# EAGLE board M226X (EAGLE 6.6.0)
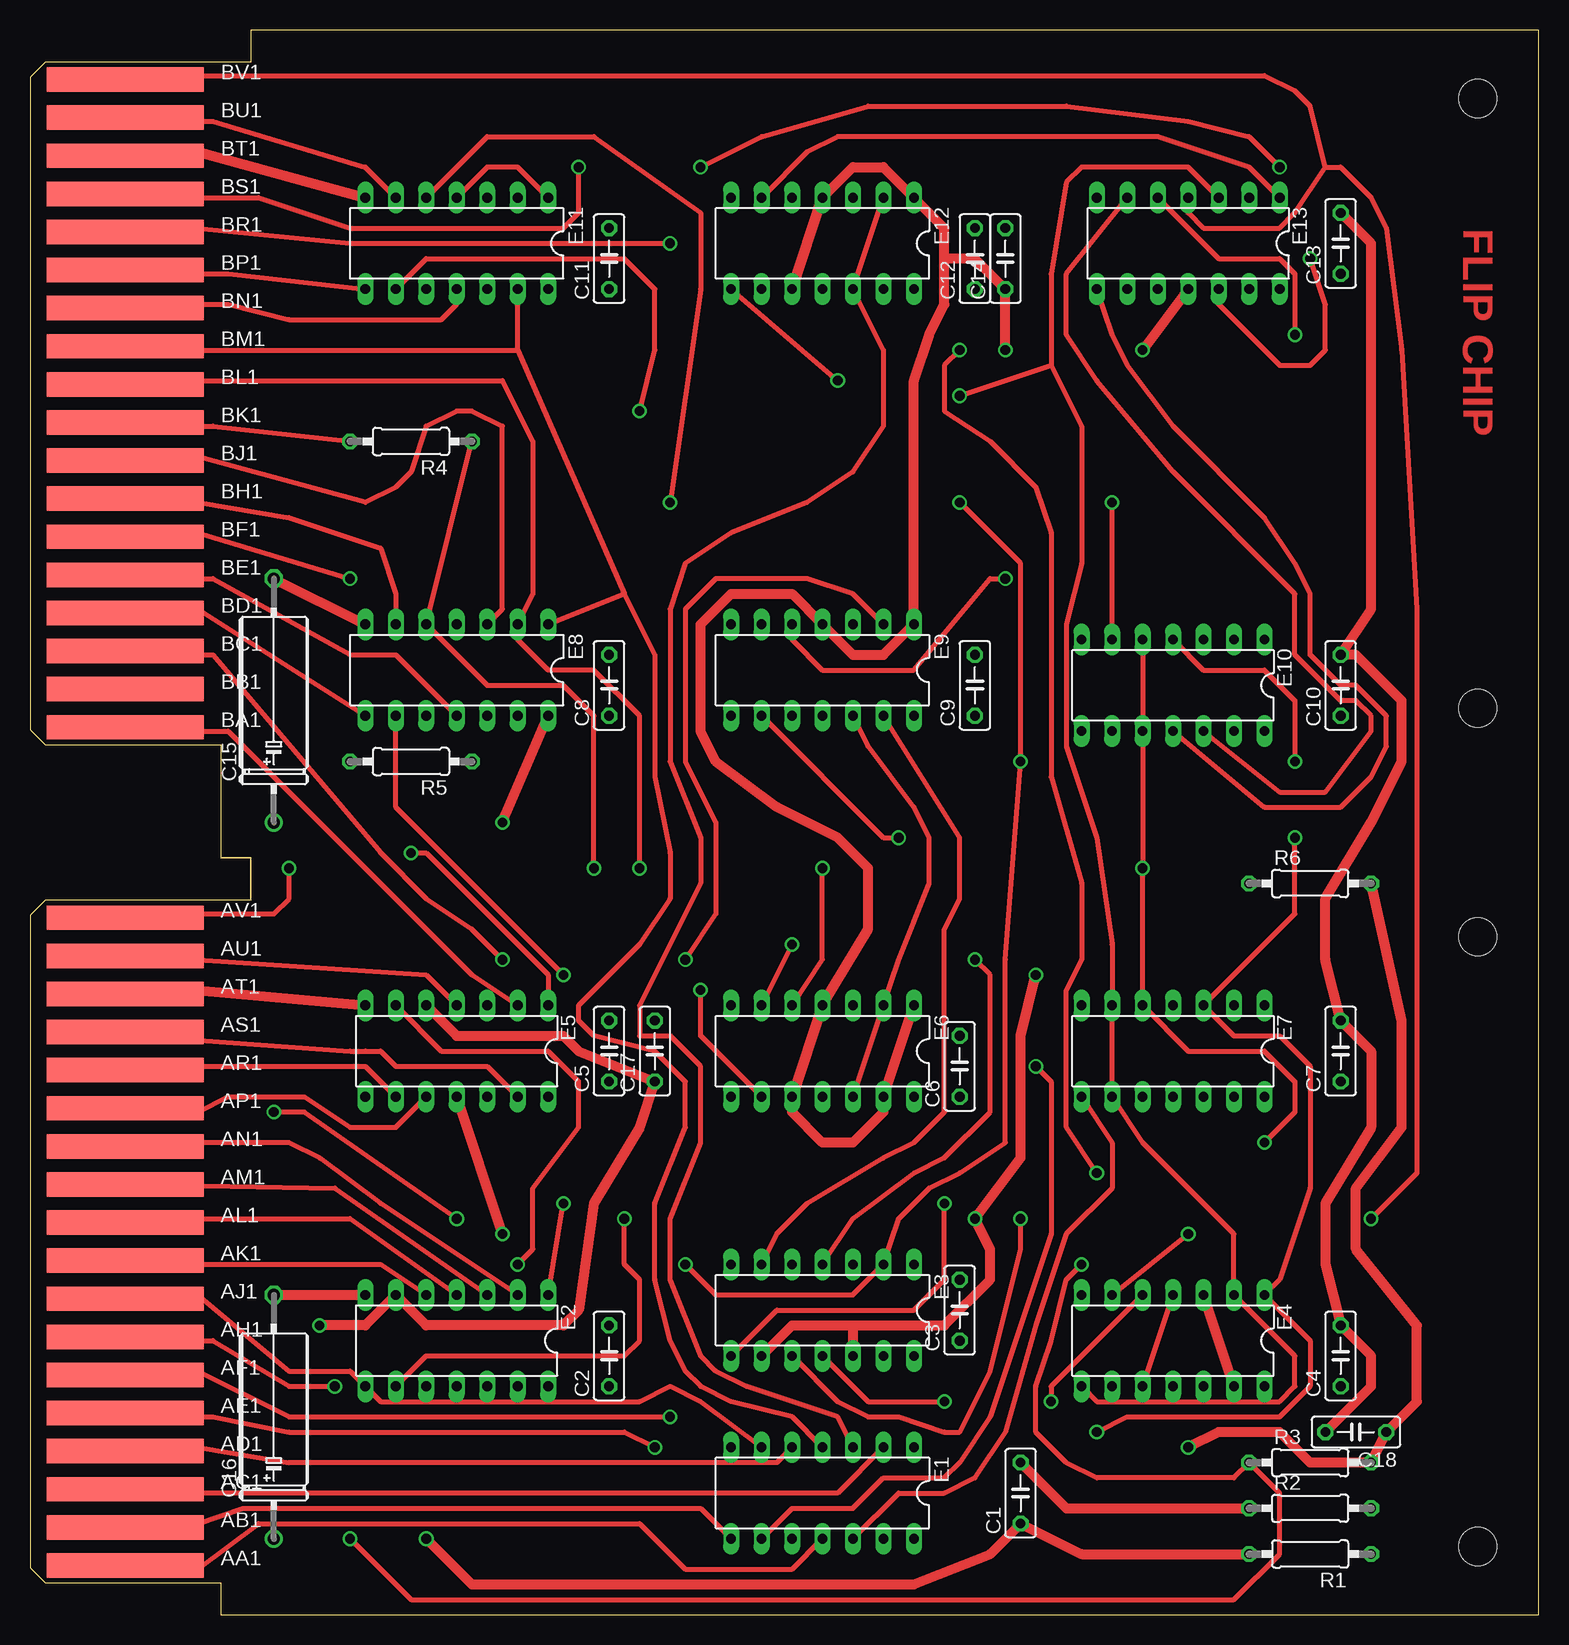
[diagram p0: board, top side]
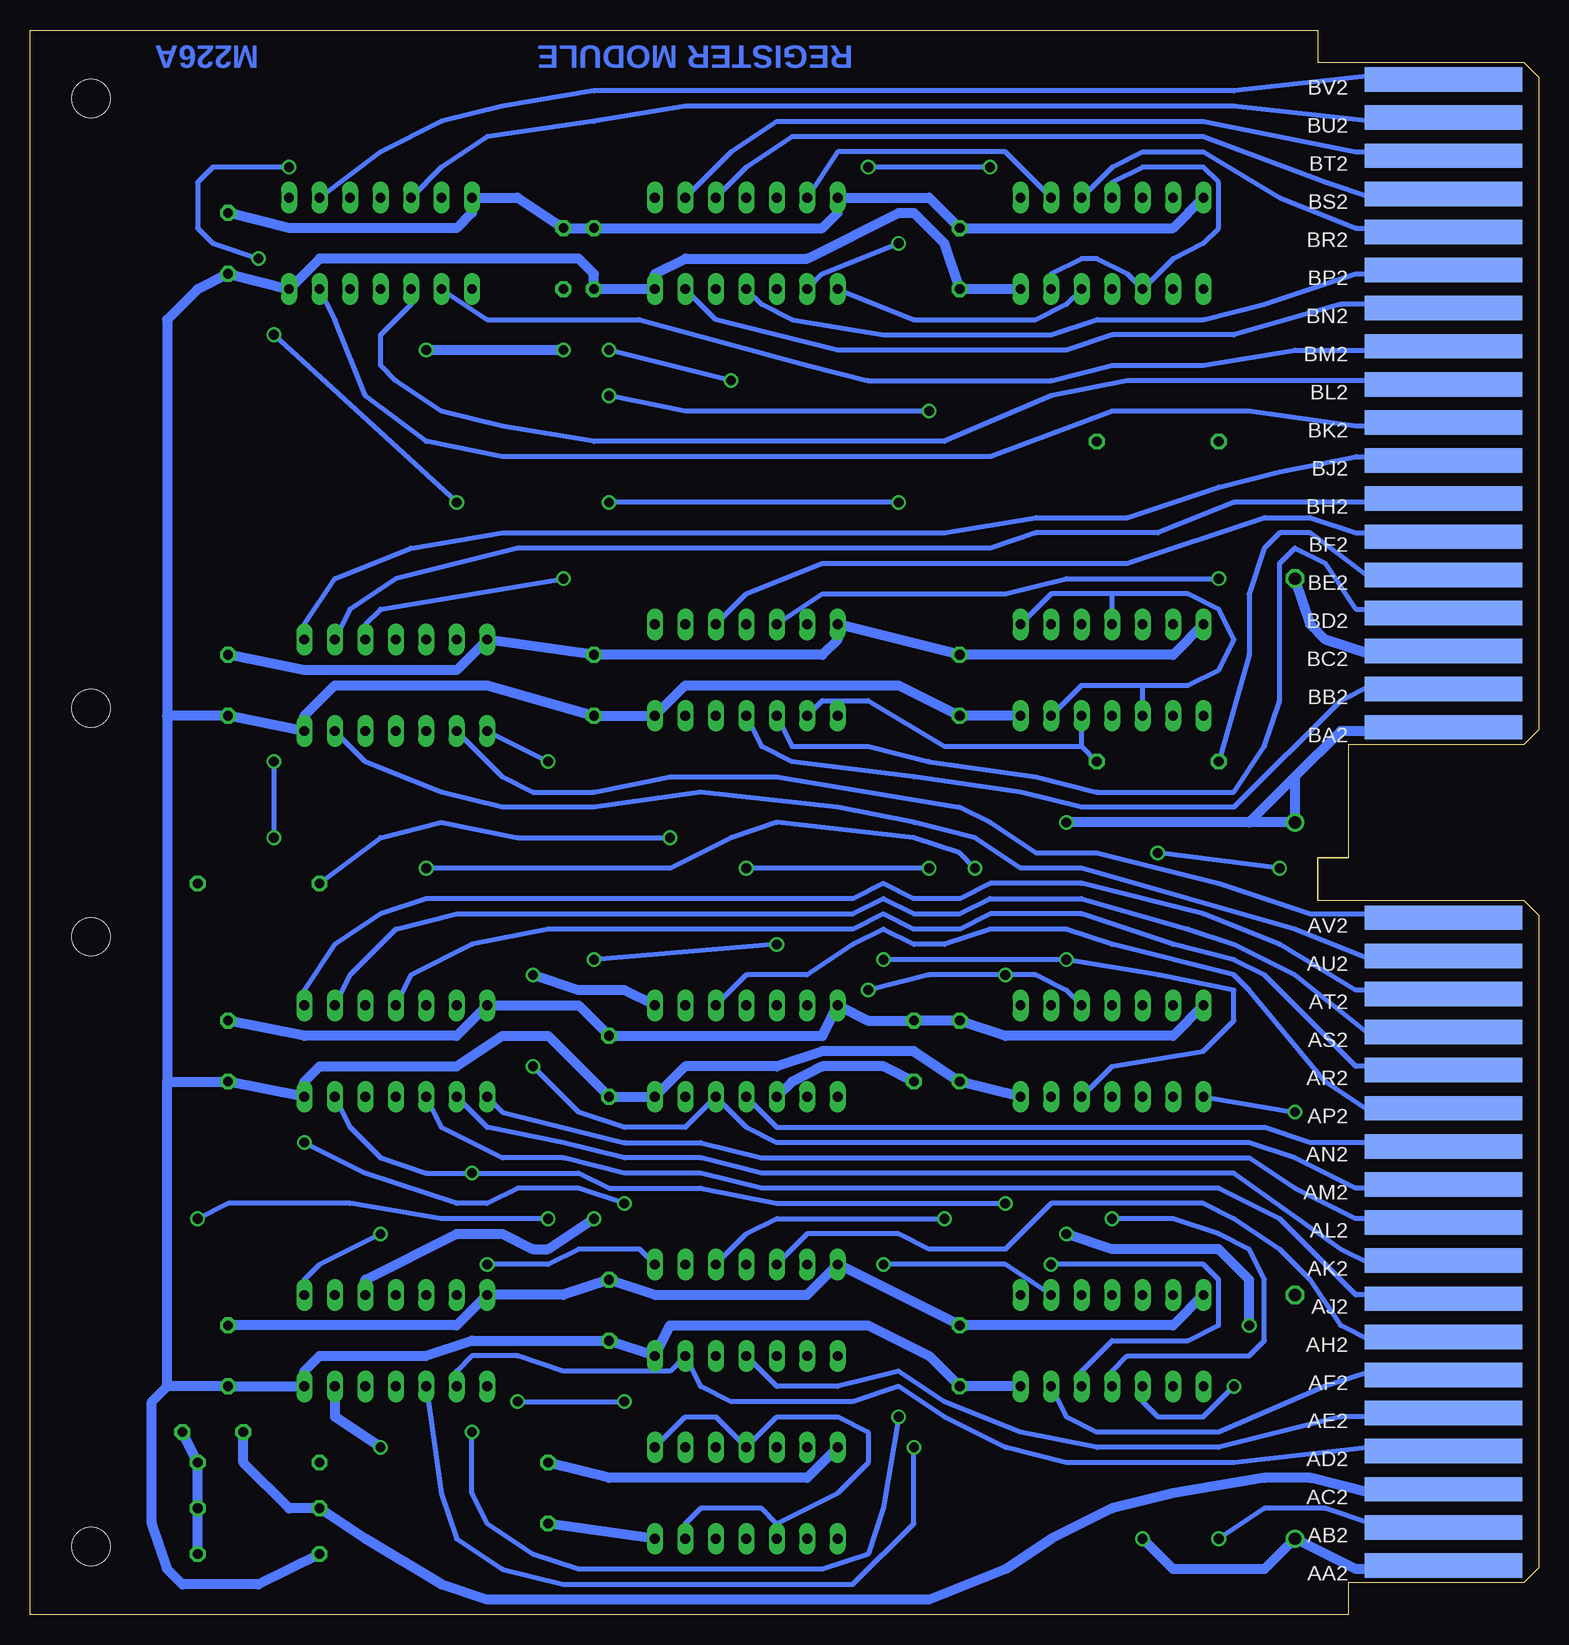
[diagram p1: board, bottom side, seen from below]

Size 125.73 x 132.08 mm. Coordinates in mm from the lower left corner, seen from the top.
Copper layers (1+16): Top 0.035mm / dielectric 1.5mm / Bottom 0.035mm
Design rules "16mils": minimum track width 16mil, minimum drill 32mil, track to track 15mil, track to pad 10mil, pad to pad 10mil, via to via 10mil, smd to smd 10mil, copper to edge 13mil, drill to drill 10mil, minimum pad ring 10mil, minimum via ring 8mil, stop-mask expansion 0mil, vias tented up to drill 0mil, thermal gap 10mil
Net classes: 1 supply: width 0.813 mm

## Footprints (pad centres in the part's own frame; a part is rotated, then mirrored left to right if it is on the bottom)
C050-025X075 = drill 0.813 octagon: 1 -2.54,0; 2 2.54,0
E12-8 = drill 1.016: + -10.16,0 | drill 1.016 octagon: - 10.16,0
DIL14 = drill 0.813 long: 1 -7.62,-3.81; 2 -5.08,-3.81; 3 -2.54,-3.81; 4 0,-3.81; 5 2.54,-3.81; 6 5.08,-3.81; 7 7.62,-3.81; 8 7.62,3.81; 9 5.08,3.81; 10 2.54,3.81; 11 0,3.81; 12 -2.54,3.81; 13 -5.08,3.81; 14 -7.62,3.81
0207/10 = drill 0.813 octagon: 1 -5.08,0; 2 5.08,0
DOUBLE = hole 3.175: 120.65,56.515; 120.65,5.715; 120.65,75.565; 120.65,126.365
EDGE-CON4 = smd 13.106 x 2.032: AA1 7.938,4.128; AB1 7.938,7.303; AC1 7.938,10.477; AD1 7.938,13.652; AE1 7.938,16.828; AF1 7.938,20.003; AH1 7.938,23.177; AJ1 7.938,26.352; AK1 7.938,29.527; AL1 7.938,32.703; AM1 7.938,35.877; AN1 7.938,39.053; AP1 7.938,42.227; AR1 7.938,45.403; AS1 7.938,48.578; AT1 7.938,51.752; AU1 7.938,54.928; AV1 7.938,58.102; BA1 7.938,73.978; BB1 7.938,77.153; BC1 7.938,80.328; BD1 7.938,83.502; BE1 7.938,86.677; BF1 7.938,89.853; BH1 7.938,93.028; BJ1 7.938,96.203; BK1 7.938,99.377; BL1 7.938,102.552; BM1 7.938,105.728; BN1 7.938,108.903; BP1 7.938,112.078; BR1 7.938,115.252; BS1 7.938,118.427; BT1 7.938,121.603; BU1 7.938,124.778; BV1 7.938,127.953 | smd 13.106 x 2.032 bottom: AA2 7.938,4.128; AB2 7.938,7.303; AC2 7.938,10.477; AD2 7.938,13.652; AE2 7.938,16.828; AF2 7.938,20.003; AH2 7.938,23.177; AJ2 7.938,26.352; AK2 7.938,29.527; AL2 7.938,32.703; AM2 7.938,35.877; AN2 7.938,39.053; AP2 7.938,42.227; AR2 7.938,45.403; AS2 7.938,48.578; AT2 7.938,51.752; AU2 7.938,54.928; AV2 7.938,58.102; BA2 7.938,73.978; BB2 7.938,77.153; BC2 7.938,80.328; BD2 7.938,83.502; BE2 7.938,86.677; BF2 7.938,89.853; BH2 7.938,93.028; BJ2 7.938,96.203; BK2 7.938,99.377; BL2 7.938,102.552; BM2 7.938,105.728; BN2 7.938,108.903; BP2 7.938,112.078; BR2 7.938,115.252; BS2 7.938,118.427; BT2 7.938,121.603; BU2 7.938,124.778; BV2 7.938,127.953

## Placement (x,y rotation side)
C1  .01uF  [C050-025X075]  82.55,10.16 90 top
C2  .01uF  [C050-025X075]  48.26,21.59 90 top
C3  .01uF  [C050-025X075]  77.47,25.4 90 top
C4  .01uF  [C050-025X075]  109.22,21.59 90 top
C5  .01uF  [C050-025X075]  48.26,46.99 90 top
C6  .01uF  [C050-025X075]  77.47,45.72 90 top
C7  .01uF  [C050-025X075]  109.22,46.99 90 top
C8  .01uF  [C050-025X075]  48.26,77.47 90 top
C9  .01uF  [C050-025X075]  78.74,77.47 90 top
C10  .01uF  [C050-025X075]  109.22,77.47 90 top
C11  .01uF  [C050-025X075]  48.26,113.03 90 top
C12  .01uF  [C050-025X075]  78.74,113.03 90 top
C13  .01uF  [C050-025X075]  109.22,114.3 90 top
C14  .01uF  [C050-025X075]  81.28,113.03 90 top
C15  6.8uF  [E12-8]  20.32,76.2 90 top
C16  6.8uF  [E12-8]  20.32,16.51 90 top
C17  .01uF  [C050-025X075]  52.07,46.99 90 top
C18  .01uF  [C050-025X075]  110.49,15.24 180 top
E1  7401N  [DIL14]  66.04,10.16 180 top
E2  74H53N  [DIL14]  35.56,22.86 180 top
E3  74H00N  [DIL14]  66.04,25.4 180 top
E4  74H50N  [DIL14]  95.25,22.86 180 top
E5  7462  [DIL14]  35.56,46.99 180 top
E6  7474N  [DIL14]  66.04,46.99 180 top
E7  74H53N  [DIL14]  95.25,46.99 180 top
E8  7401N  [DIL14]  35.56,78.74 180 top
E9  7474N  [DIL14]  66.04,78.74 180 top
E10  74H53N  [DIL14]  95.25,77.47 180 top
E11  7401N  [DIL14]  35.56,114.3 180 top
E12  7474N  [DIL14]  66.04,114.3 180 top
E13  7462  [DIL14]  96.52,114.3 180 top
R1  330  [0207/10]  106.68,5.08 180 top
R2  750  [0207/10]  106.68,8.89 0 top
R3  750  [0207/10]  106.68,12.7 0 top
R4  120  [0207/10]  31.75,97.79 180 top
R5  120  [0207/10]  31.75,71.12 180 top
R6  750  [0207/10]  106.68,60.96 0 top
U$1  OUTLINE-DOUBLE  [DOUBLE]  0,0 0 top
U$3  [EDGE-CON4]  0,0 0 top

## Library data of the parts
C1-C14 C17 C18 R1-R6 = rcl
C15 C16 E2 E4 E5 E7 E10 E13 U$1 U$3 = dec-con
E1 E3 E6 E8 E9 E11 E12 = 74xx-us

## Nets
+3V3 [supply]: C14.1 C17.1 C18.1 E2.6 E3.9 E3.12 E4.3 E4.13 E5.5 E5.11 E6.1 E6.4 E6.10 E6.13 E9.1 E9.4 E12.1 E12.4 E12.10 E13.11 R1.1 R2.2 R3.2 R6.2
GND [supply]: C1.2 C2.2 C3.2 C4.2 C5.2 C6.2 C7.2 C8.2 C9.2 C10.2 C11.2 C12.2 C13.2 C14.2 C15.- C16.- C17.2 C18.2 E1.7 E2.7 E3.7 E4.7 E5.7 E6.7 E7.7 E8.7 E9.7 E10.7 E11.7 E12.7 E13.7 R2.1 U$3.AC2 U$3.AT1 U$3.BC2 U$3.BT1
N$1: E2.12 E5.6
N$2: E2.11 E5.8
N$3: E10.11 E13.8
N$4: E10.12 E13.6
N$5: E2.10 U$3.AH1
N$6: E2.3 U$3.AM1
N$7: E2.13 U$3.AF2
N$8: E2.4 U$3.AL1
N$9: E2.5 U$3.AK1
N$10: E5.10 U$3.AP1
N$11: E5.9 U$3.AR1
N$12: E5.1 U$3.AV1
N$13: E5.2 U$3.BA1
N$14: E5.13 U$3.AS1
N$15: E5.4 U$3.AU1
N$16: E2.9 E3.3
N$17: E4.1 E4.6 E7.3 E10.4 U$3.AF1
N$18: E2.1 E7.13 E11.12 E12.8
N$19: E11.11 U$3.BN1
N$20: E5.3 E6.9 E8.9
N$21: E5.12 E9.2 U$3.BC1
N$22: E7.10 U$3.AJ2
N$23: E7.2 U$3.AS2
N$24: E7.1 U$3.AT2
N$25: E7.4 U$3.AR2
N$26: E10.6 E13.5 U$3.BU2
N$27: E1.3 E12.2 E12.12 U$3.BT2
N$28: E4.2 E4.8 E7.6 E7.9 E11.9 E13.3 U$3.AK2
N$29: E3.8 E7.5 E8.5 E10.5 E10.10 R4.1
N$30: E8.11 U$3.BE1
N$31: E10.9 U$3.AV2
N$32: E10.2 U$3.BH2
N$33: E10.1 U$3.BJ2
N$34: E10.13 U$3.AU2
N$35: E3.10 E13.4 U$3.BV1
N$36: E11.2 E12.6 E13.1
N$37: E13.9 U$3.BM2
N$38: E13.10 U$3.BL2
N$39: E13.2 U$3.BV2
N$40: E13.13 U$3.BK2
N$41: E13.12 U$3.BS1
N$42: E3.13 E4.9 U$3.AD2
N$43: E4.4 E4.10 U$3.AE1
N$44: R4.2 U$3.BK1
N$45: E3.11 E4.5 U$3.AE2
N$46: E9.3 U$3.BF2
N$47: E9.5 E10.3 U$3.BF1
N$48: E12.3 U$3.BS2
N$49: E1.9 E6.2 E6.12 E9.12 U$3.AM2
N$50: E6.11 U$3.AN2
N$52: E1.12 E7.8 U$3.AL2
N$53: E1.11 U$3.AA1
N$54: E12.9 U$3.BR1
N$55: E12.13 U$3.BN2
N$56: E12.11 U$3.BP2
N$57: E8.12 E9.9 R5.1 R6.1
N$58: E6.3 U$3.AP2
N$59: E9.10 U$3.BD2
N$60: E9.11 U$3.BB2
N$61: E3.6 E9.13
N$62: E3.5 U$3.AH2
N$63: E6.5 E8.2 U$3.BL1
N$64: E3.4 E6.6
N$65: R5.2 U$3.BE2
N$66: E3.1 R3.1 U$3.AB2
N$67: E2.2 E3.2 E10.8 E11.5 U$3.AN1
N$68: E11.6 U$3.BU1
N$69: E1.6 E2.8 U$3.AJ1
N$70: E1.5 U$3.AD1
N$71: E1.1 E1.4 E1.10 E1.13 E8.1 E8.4 E8.10 E8.13 E11.1 E11.4 E11.10 E11.13 U$3.BM1
N$72: E1.2 U$3.AC1
N$73: E8.8 U$3.BD1
N$74: E8.3 U$3.BJ1
N$75: E11.8 U$3.BP1
N$76: E11.3 U$3.BR2
N$77: E8.6 U$3.BH1
N$79: E1.8 U$3.AB1
VCC [supply]: C1.1 C2.1 C3.1 C4.1 C5.1 C6.1 C7.1 C8.1 C9.1 C10.1 C11.1 C12.1 C13.1 C15.+ C16.+ E1.14 E2.14 E3.14 E4.14 E5.14 E6.14 E7.14 E8.14 E9.14 E10.14 E11.14 E12.14 E13.14 R1.2 U$3.AA2 U$3.BA2

## Tracks (layer width: path | path; a pad name or v marks a point on that pad's centre or on a via)
+3V3  (via drill 0.81)
  Top 0.813: R6.2 114.3,49.53 114.3,40.64 110.49,35.56 110.49,30.48 115.57,24.13 115.57,17.78 C18.1 R3.2 106.68,12.7 104.14,15.24 99.06,15.24 v96.52,13.97 | E4.13 E4.3 | E5.11 v39.37,31.75 | E13.11 v92.71,105.41 | v24.13,24.13 27.94,24.13 E2.6 33.02,24.13 44.45,24.13 45.72,25.4 46.99,34.29 50.8,40.64 C17.1 45.72,46.99 44.45,48.26 35.56,48.26 E5.5 | 68.58,24.13 76.2,24.13 80.01,27.94 80.01,30.48 v78.74,33.02 82.55,38.1 82.55,48.26 v83.82,53.34 | E12.10 E12.4 68.58,120.65 71.12,120.65 E12.1 76.2,115.57 76.2,113.03 | 76.2,113.03 76.2,109.22 74.93,106.68 73.66,102.87 E9.1 71.12,80.01 68.58,80.01 E9.4 63.5,85.09 58.42,85.09 55.88,82.55 55.88,73.66 57.15,71.12 62.23,67.31 67.31,64.77 69.85,62.23 69.85,57.15 E6.4 E6.10 63.5,41.91 66.04,39.37 68.58,39.37 71.12,41.91 E6.13 E6.1 | v81.28,105.41 C14.1 78.74,113.03 76.2,113.03 | E3.9 63.5,24.13 68.58,24.13 | 68.58,24.13 E3.12
  Bottom 0.813: R1.1 R2.2 R3.2 C18.1 | C17.1 54.61,45.72 59.69,45.72 62.23,44.45 E6.10 | E6.1 76.2,52.07 80.01,52.07 v83.82,53.34 | E4.13 100.33,16.51 v96.52,13.97 | E4.3 97.79,27.94 90.17,31.75 86.36,31.75 83.82,30.48 82.55,30.48 v78.74,33.02 | v24.13,24.13 24.13,27.94 26.67,30.48 35.56,30.48 v39.37,31.75 | v81.28,105.41 v92.71,105.41
GND
  Top 0.813: C18.2 111.76,19.05 111.76,21.59 C4.2 107.95,29.21 107.95,34.29 111.76,40.64 111.76,46.99 C7.2 107.95,54.61 107.95,59.69 111.76,66.04 114.3,71.12 114.3,76.2 110.49,80.01 C10.2 111.76,83.82 111.76,114.3 C13.2 | C1.2 86.36,8.89 R2.1 | U$3.AT1 8.89,52.07 13.97,52.07 E5.7 | C15.- E8.7 | U$3.BT1 8.89,121.92 13.97,121.92 E11.7 | C16.- E2.7
  Bottom 0.813: E11.7 30.48,115.57 C11.2 50.8,118.11 E12.7 58.42,116.84 59.69,115.57 C12.2 C14.2 85.09,118.11 E13.7 88.9,116.84 90.17,115.57 104.14,115.57 C13.2 | U$3.AC2 8.89,10.16 13.97,10.16 19.05,11.43 22.86,11.43 30.48,10.16 35.56,8.89 40.64,6.35 44.45,3.81 50.8,1.27 87.63,1.27 91.44,2.54 97.79,6.35 R2.1 104.14,8.89 107.95,12.7 C18.2 | E1.7 60.96,11.43 77.47,11.43 C1.2 | E2.7 30.48,24.13 C2.2 E3.7 60.96,26.67 73.66,26.67 C3.2 81.28,26.67 E4.7 90.17,24.13 C4.2 | E5.7 30.48,48.26 44.45,48.26 C5.2 C17.2 55.88,49.53 E6.7 59.69,48.26 C6.2 80.01,50.8 E7.7 90.17,48.26 102.87,48.26 C7.2 | C10.2 102.87,78.74 90.17,78.74 E10.7 C9.2 59.69,80.01 58.42,81.28 E9.7 C8.2 30.48,80.01 E8.7 | U$3.BC2 10.16,80.01 13.97,80.01 17.78,81.28 19.05,82.55 C15.-
N$1  (via drill 0.81)
  Top 0.406: v40.64,29.21 41.91,30.48 41.91,35.56 45.72,40.64 45.72,44.45 43.18,46.99 34.29,46.99 E5.6
  Bottom 0.406: E2.12 38.1,20.32 35.56,22.86 29.21,22.86 26.67,24.13 26.67,27.94 27.94,29.21 v40.64,29.21
N$2  (via drill 0.81)
  Top 0.406: v35.56,33.02 22.86,41.91 v20.32,41.91
  Bottom 0.406: E5.8 v20.32,41.91 | E2.11 35.56,20.32 34.29,21.59 24.13,21.59 22.86,22.86 22.86,27.94 24.13,30.48 26.67,31.75 30.48,33.02 v35.56,33.02
N$3
  Top 0.406: E10.11 102.87,67.31 109.22,67.31 111.76,69.85 113.03,72.39 113.03,74.93 110.49,77.47 109.22,77.47 106.68,80.01 106.68,85.09 105.41,87.63 102.87,91.44 95.25,99.06 91.44,104.14 90.17,106.68 E13.8
N$4
  Top 0.406: E10.12 104.14,68.58 107.95,68.58 111.76,73.66 111.76,74.93 110.49,76.2 109.22,76.2 105.41,80.01 105.41,85.09 95.25,95.25 88.9,102.87 86.36,106.68 86.36,111.76 E13.6
N$5  (via drill 0.81)
  Top 0.406: U$3.AH1 8.89,22.86 15.24,22.86 21.59,19.05 v25.4,19.05
  Bottom 0.406: E2.10 33.02,17.78 31.75,16.51 27.94,16.51 v25.4,19.05
N$6
  Top 0.406: U$3.AM1 25.4,35.56 E2.3
N$7
  Bottom 0.406: U$3.AF2 11.43,20.32 13.97,20.32 17.78,19.05 26.67,15.24 36.83,15.24 39.37,16.51 E2.13
N$8
  Top 0.406: U$3.AL1 10.16,33.02 26.67,33.02 E2.4
N$9
  Top 0.406: U$3.AK1 8.89,29.21 29.21,29.21 E2.5
N$10
  Top 0.406: U$3.AP1 8.89,41.91 13.97,41.91 16.51,43.18 22.86,43.18 26.67,40.64 30.48,40.64 E5.10
N$11
  Top 0.406: U$3.AR1 8.89,45.72 27.94,45.72 E5.9
N$12  (via drill 0.81)
  Top 0.406: U$3.AV1 10.16,58.42 20.32,58.42 21.59,59.69 v21.59,62.23 | v31.75,63.5 33.02,63.5 43.18,53.34 E5.1
  Bottom 0.406: v21.59,62.23 v31.75,63.5
N$13
  Top 0.406: U$3.BA1 8.89,73.66 16.51,73.66 36.83,53.34 E5.2
N$14
  Top 0.406: U$3.AS1 8.89,48.26 26.67,46.99 27.94,46.99 29.21,46.99 30.48,45.72 38.1,45.72 E5.13
N$15
  Top 0.406: U$3.AU1 8.89,54.61 13.97,54.61 33.02,53.34 E5.4
N$16  (via drill 0.81)
  Top 0.406: E2.9 33.02,21.59 49.53,21.59 50.8,22.86 50.8,27.94 49.53,29.21 v49.53,33.02
  Bottom 0.406: E3.3 66.04,31.75 63.5,33.02 v49.53,33.02
N$17  (via drill 0.81)
  Top 0.406: E4.6 v96.52,31.75 | U$3.AF1 8.89,20.32 13.97,20.32 21.59,16.51 v53.34,16.51 | v88.9,15.24 91.44,16.51 104.14,16.51 106.68,19.05 106.68,22.86 E4.1 104.14,27.94 106.68,35.56 106.68,45.72 104.14,48.26 100.33,48.26 E7.3 105.41,58.42 v105.41,64.77 | E10.4 97.79,78.74 102.87,78.74 105.41,76.2 v105.41,71.12
  Bottom 0.406: E4.1 102.87,27.94 101.6,29.21 v96.52,31.75 | v53.34,16.51 54.61,8.89 55.88,5.08 59.69,3.81 80.01,3.81 83.82,5.08 87.63,7.62 88.9,10.16 v88.9,15.24 | v105.41,71.12 v105.41,64.77
N$18  (via drill 0.81)
  Top 0.406: E2.1 v44.45,34.29 | E12.8 v67.31,102.87 | v77.47,105.41 76.2,104.14 76.2,100.33 80.01,97.79 83.82,93.98 85.09,90.17 85.09,69.85 87.63,60.96 87.63,54.61 86.36,52.07 86.36,40.64 v88.9,36.83
  Bottom 0.406: E12.8 52.07,107.95 41.91,107.95 39.37,109.22 E11.12 | E7.13 99.06,40.64 96.52,38.1 92.71,36.83 v88.9,36.83 80.01,36.83 77.47,35.56 69.85,35.56 63.5,34.29 v44.45,34.29 | v67.31,102.87 v77.47,105.41
N$19
  Top 0.406: U$3.BN1 8.89,109.22 16.51,109.22 21.59,107.95 34.29,107.95 35.56,109.22 E11.11
N$20  (via drill 0.81)
  Top 0.406: v44.45,53.34 30.48,67.31 E8.9 | E6.9 55.88,48.26 v55.88,52.07
  Bottom 0.406: E5.3 39.37,52.07 41.91,53.34 v44.45,53.34 50.8,53.34 v55.88,52.07
N$21  (via drill 0.81)
  Top 0.406: U$3.BC1 10.16,80.01 15.24,80.01 29.21,63.5 33.02,59.69 36.83,57.15 v39.37,54.61 | E9.2 68.58,85.09 64.77,86.36 57.15,86.36 54.61,83.82 54.61,71.12 57.15,66.04 57.15,58.42 v54.61,54.61
  Bottom 0.406: E5.12 35.56,45.72 27.94,46.99 25.4,49.53 25.4,52.07 31.75,53.34 v39.37,54.61 v54.61,54.61
N$22
  Bottom 0.406: U$3.AJ2 10.16,26.67 15.24,26.67 21.59,33.02 26.67,35.56 64.77,35.56 69.85,36.83 76.2,36.83 81.28,38.1 86.36,38.1 91.44,40.64 E7.10
N$23
  Bottom 0.406: E7.2 99.06,53.34 95.25,57.15 90.17,58.42 57.15,58.42 54.61,59.69 52.07,58.42 48.26,58.42 45.72,59.69 38.1,59.69 29.21,57.15 25.4,55.88 20.32,53.34 13.97,48.26 8.89,48.26 U$3.AS2
N$24
  Bottom 0.406: U$3.AT2 10.16,52.07 15.24,52.07 21.59,55.88 27.94,58.42 38.1,60.96 45.72,60.96 48.26,59.69 52.07,59.69 54.61,60.96 57.15,59.69 92.71,59.69 96.52,58.42 100.33,55.88 102.87,52.07 E7.1
N$25
  Bottom 0.406: U$3.AR2 11.43,45.72 15.24,45.72 22.86,53.34 25.4,54.61 30.48,55.88 38.1,58.42 45.72,58.42 48.26,57.15 52.07,57.15 54.61,58.42 57.15,57.15 82.55,57.15 88.9,55.88 93.98,53.34 E7.4
N$26  (via drill 0.81)
  Top 0.406: E10.6 v90.17,92.71 | E13.5 99.06,113.03 104.14,113.03 105.41,111.76 v105.41,106.68
  Bottom 0.406: U$3.BU2 11.43,124.46 13.97,124.46 25.4,125.73 71.12,125.73 78.74,124.46 87.63,123.19 91.44,120.65 E13.5 | v90.17,92.71 v105.41,106.68
N$27
  Top 0.406: E12.2 E12.12 71.12,105.41 71.12,99.06 68.58,95.25 64.77,92.71 58.42,90.17 54.61,87.63 53.34,83.82 53.34,71.12 55.88,64.77 55.88,60.96 50.8,50.8 50.8,48.26 53.34,48.26 55.88,45.72 55.88,39.37 53.34,33.02 53.34,27.94 55.88,21.59 57.15,20.32 59.69,19.05 67.31,16.51 E1.3
  Bottom 0.406: E12.2 67.31,121.92 63.5,124.46 27.94,124.46 15.24,121.92 8.89,121.92 U$3.BT2
N$28  (via drill 0.81)
  Top 0.406: E4.8 88.9,17.78 104.14,17.78 105.41,19.05 105.41,21.59 E4.2 100.33,31.75 92.71,39.37 E7.9 E7.6 90.17,55.88 88.9,64.77 86.36,72.39 86.36,82.55 87.63,87.63 87.63,99.06 85.09,104.14 | E13.3 96.52,120.65 87.63,120.65 86.36,119.38 85.09,111.76 85.09,104.14 | v50.8,100.33 52.07,105.41 52.07,110.49 49.53,113.03 33.02,113.03 E11.9 | v77.47,101.6 85.09,104.14
  Bottom 0.406: U$3.AK2 10.16,29.21 13.97,29.21 16.51,30.48 25.4,36.83 64.77,36.83 69.85,38.1 76.2,38.1 81.28,39.37 87.63,40.64 E7.9 | v50.8,100.33 71.12,100.33 v77.47,101.6
N$29  (via drill 0.81)
  Top 0.406: R4.1 E8.5 38.1,77.47 44.45,77.47 46.99,74.93 v46.99,62.23 | E10.5 E10.10 v92.71,62.23 E7.5 96.52,46.99 102.87,46.99 105.41,44.45 105.41,41.91 v102.87,39.37 | E3.8 62.23,25.4 73.66,25.4 76.2,27.94 v76.2,34.29
  Bottom 0.406: v46.99,62.23 48.26,63.5 52.07,64.77 63.5,66.04 67.31,64.77 72.39,62.23 v92.71,62.23 | v76.2,34.29 80.01,35.56 85.09,35.56 87.63,34.29 90.17,34.29 97.79,36.83 v102.87,39.37
N$30
  Top 0.406: U$3.BE1 8.89,86.36 15.24,86.36 26.67,80.01 30.48,80.01 E8.11
N$31
  Bottom 0.406: E10.9 86.36,69.85 83.82,68.58 78.74,68.58 72.39,69.85 63.5,69.85 48.26,67.31 45.72,66.04 41.91,63.5 36.83,63.5 26.67,60.96 19.05,58.42 8.89,58.42 U$3.AV2
N$32
  Bottom 0.406: U$3.BH2 10.16,92.71 25.4,92.71 31.75,90.17 41.91,90.17 45.72,88.9 85.09,88.9 95.25,86.36 99.06,83.82 E10.2
N$33
  Bottom 0.406: E10.1 102.87,82.55 100.33,86.36 93.98,88.9 86.36,90.17 49.53,90.17 41.91,91.44 34.29,91.44 26.67,93.98 21.59,95.25 15.24,96.52 8.89,96.52 U$3.BJ2
N$34
  Bottom 0.406: U$3.AU2 10.16,54.61 13.97,54.61 20.32,57.15 38.1,62.23 43.18,62.23 46.99,64.77 52.07,66.04 58.42,67.31 69.85,68.58 78.74,67.31 86.36,67.31 91.44,68.58 97.79,71.12 E10.13
N$35  (via drill 0.81)
  Top 0.406: U$3.BV1 8.89,128.27 102.87,128.27 105.41,127 106.68,125.73 107.95,120.65 | E13.4 96.52,116.84 97.79,115.57 104.14,115.57 105.41,116.84 107.95,120.65 | 107.95,120.65 109.22,120.65 111.76,118.11 113.03,115.57 114.3,105.41 115.57,83.82 115.57,36.83 v111.76,33.02 | E3.10 67.31,17.78 69.85,16.51 72.39,16.51 76.2,15.24 77.47,15.24 80.01,20.32 82.55,30.48 v82.55,33.02
  Bottom 0.406: v82.55,33.02 91.44,33.02 99.06,34.29 109.22,34.29 v111.76,33.02
N$36
  Top 0.406: E13.1 101.6,120.65 93.98,123.19 67.31,123.19 64.77,121.92 E12.6
  Bottom 0.406: E11.2 44.45,121.92 58.42,121.92 E12.6
N$37
  Bottom 0.406: E13.9 87.63,107.95 74.93,107.95 60.96,104.14 55.88,102.87 40.64,102.87 35.56,104.14 27.94,104.14 20.32,105.41 8.89,105.41 U$3.BM2
N$38
  Bottom 0.406: U$3.BL2 10.16,102.87 34.29,102.87 40.64,101.6 49.53,97.79 78.74,97.79 86.36,99.06 91.44,100.33 95.25,102.87 96.52,104.14 96.52,106.68 93.98,109.22 E13.10
N$39
  Bottom 0.406: U$3.BV2 11.43,128.27 13.97,128.27 25.4,127 78.74,127 86.36,125.73 91.44,124.46 96.52,121.92 E13.2
N$40
  Bottom 0.406: U$3.BK2 11.43,99.06 15.24,99.06 24.13,100.33 35.56,100.33 45.72,96.52 86.36,96.52 92.71,97.79 97.79,101.6 100.33,107.95 E13.13
N$41  (via drill 0.81)
  Top 0.406: U$3.BS1 8.89,118.11 19.05,118.11 26.67,115.57 44.45,115.57 45.72,116.84 v45.72,120.65 | v55.88,120.65 60.96,123.19 69.85,125.73 86.36,125.73 96.52,124.46 101.6,123.19 v104.14,120.65 | E13.12 99.06,109.22 104.14,104.14 106.68,104.14 107.95,105.41 107.95,109.22 v106.68,113.03
  Bottom 0.406: v45.72,120.65 v55.88,120.65 | v104.14,120.65 110.49,120.65 111.76,119.38 111.76,115.57 110.49,114.3 v106.68,113.03
N$42
  Bottom 0.406: U$3.AD2 10.16,13.97 13.97,13.97 25.4,12.7 39.37,12.7 44.45,13.97 49.53,16.51 53.34,19.05 57.15,17.78 67.31,17.78 69.85,19.05 E3.13 72.39,20.32 81.28,20.32 85.09,21.59 88.9,21.59 90.17,20.32 E4.9
N$43  (via drill 0.81)
  Top 0.406: E4.10 E4.4 | U$3.AE1 8.89,16.51 15.24,16.51 21.59,15.24 49.53,15.24 v52.07,13.97
  Bottom 0.406: E4.10 91.44,10.16 90.17,6.35 86.36,3.81 81.28,2.54 57.15,2.54 52.07,7.62 v52.07,13.97
N$44
  Top 0.406: U$3.BK1 8.89,99.06 15.24,99.06 R4.2
N$45  (via drill 0.81)
  Top 0.406: E3.11 69.85,17.78 v76.2,17.78 | E4.5 85.09,19.05 v85.09,17.78
  Bottom 0.406: U$3.AE2 11.43,16.51 16.51,16.51 26.67,13.97 36.83,13.97 43.18,15.24 49.53,17.78 53.34,20.32 58.42,19.05 63.5,19.05 E3.11 | v85.09,17.78 v76.2,17.78
N$46
  Bottom 0.406: E9.3 66.04,85.09 59.69,87.63 34.29,87.63 22.86,91.44 19.05,91.44 15.24,90.17 8.89,90.17 U$3.BF2
N$47  (via drill 0.81)
  Top 0.406: U$3.BF1 8.89,90.17 13.97,90.17 v26.67,86.36 | E9.5 63.5,81.28 66.04,78.74 73.66,78.74 80.01,86.36 v81.28,86.36
  Bottom 0.406: E9.5 59.69,85.09 44.45,85.09 39.37,86.36 v26.67,86.36 | E10.3 97.79,82.55 96.52,83.82 v81.28,86.36
N$48
  Bottom 0.406: U$3.BS2 10.16,118.11 13.97,118.11 17.78,119.38 27.94,123.19 62.23,123.19 66.04,120.65 E12.3
N$49  (via drill 0.81)
  Top 0.406: v83.82,45.72 85.09,44.45 85.09,31.75 80.01,16.51 77.47,12.7 76.2,11.43 71.12,11.43 68.58,8.89 63.5,8.89 E1.9 | E6.12 E6.2 72.39,54.61 74.93,60.96 74.93,64.77 73.66,67.31 69.85,72.39 E9.12
  Bottom 0.406: U$3.AM2 10.16,35.56 15.24,35.56 20.32,38.1 24.13,39.37 63.5,39.37 66.04,40.64 E6.12 71.12,40.64 76.2,40.64 80.01,41.91 v83.82,45.72
N$50
  Bottom 0.406: E6.11 63.5,40.64 22.86,40.64 19.05,39.37 8.89,39.37 U$3.AN2
N$52
  Top 0.406: E7.8 90.17,39.37 90.17,35.56 86.36,31.75 83.82,24.13 81.28,15.24 78.74,11.43 76.2,10.16 72.39,10.16 E1.12
  Bottom 0.406: E7.8 86.36,41.91 76.2,39.37 69.85,39.37 64.77,38.1 24.13,38.1 20.32,35.56 15.24,33.02 10.16,33.02 U$3.AL2
N$53
  Top 0.406: U$3.AA1 8.89,3.81 13.97,3.81 19.05,7.62 50.8,7.62 54.61,3.81 63.5,3.81 E1.11
N$54  (via drill 0.81)
  Top 0.406: U$3.BR1 8.89,115.57 13.97,115.57 26.67,114.3 v53.34,114.3
  Bottom 0.406: E12.9 59.69,111.76 v53.34,114.3
N$55
  Bottom 0.406: U$3.BN2 11.43,109.22 16.51,109.22 25.4,106.68 35.56,106.68 39.37,105.41 58.42,105.41 68.58,107.95 E12.13
N$56
  Bottom 0.406: E12.11 64.77,109.22 62.23,107.95 54.61,106.68 40.64,106.68 36.83,107.95 27.94,107.95 22.86,109.22 15.24,111.76 8.89,111.76 U$3.BP2
N$57  (via drill 0.81)
  Top 0.406: E9.9 71.12,64.77 v72.39,64.77
  Bottom 0.406: R5.1 38.1,72.39 | 38.1,72.39 E8.12 | E9.9 59.69,76.2 55.88,76.2 49.53,72.39 38.1,72.39 | R6.1 96.52,64.77 91.44,66.04 85.09,64.77 v72.39,64.77
N$58
  Bottom 0.406: U$3.AP2 10.16,41.91 13.97,41.91 17.78,44.45 24.13,52.07 25.4,53.34 35.56,55.88 39.37,57.15 45.72,57.15 49.53,55.88 52.07,55.88 54.61,57.15 57.15,55.88 60.96,53.34 66.04,53.34 E6.3
N$59
  Bottom 0.406: E9.10 62.23,72.39 55.88,72.39 50.8,71.12 41.91,69.85 36.83,68.58 25.4,68.58 22.86,72.39 21.59,76.2 21.59,87.63 20.32,88.9 17.78,87.63 15.24,83.82 8.89,83.82 U$3.BD2
N$60
  Bottom 0.406: U$3.BB2 8.89,77.47 13.97,77.47 16.51,76.2 25.4,67.31 38.1,67.31 43.18,68.58 52.07,69.85 62.23,71.12 64.77,72.39 E9.11
N$61
  Top 0.406: E3.6 62.23,31.75 64.77,34.29 71.12,38.1 73.66,39.37 76.2,41.91 76.2,57.15 77.47,59.69 77.47,64.77 E9.13
N$62
  Bottom 0.406: U$3.AH2 8.89,22.86 13.97,22.86 16.51,24.13 19.05,27.94 21.59,30.48 25.4,33.02 27.94,34.29 40.64,34.29 44.45,30.48 50.8,30.48 53.34,31.75 60.96,31.75 E3.5
N$63  (via drill 0.81)
  Top 0.406: U$3.BL1 8.89,102.87 39.37,102.87 41.91,97.79 41.91,85.09 E8.2 40.64,81.28 43.18,78.74 46.99,78.74 50.8,74.93 v50.8,62.23 | E6.5 66.04,54.61 v66.04,62.23
  Bottom 0.406: v50.8,62.23 v66.04,62.23
N$64  (via drill 0.81)
  Top 0.406: E3.4 68.58,33.02 73.66,36.83 76.2,38.1 80.01,41.91 80.01,53.34 v78.74,54.61 | E6.6 v63.5,55.88
  Bottom 0.406: v63.5,55.88 v78.74,54.61
N$65
  Bottom 0.406: U$3.BE2 10.16,86.36 13.97,86.36 19.05,90.17 21.59,90.17 22.86,88.9 24.13,85.09 24.13,80.01 R5.2
N$66  (via drill 0.81)
  Top 0.406: v26.67,6.35 31.75,1.27 100.33,1.27 104.14,5.08 104.14,10.16 R3.1 100.33,11.43 88.9,11.43 86.36,12.7 83.82,15.24 83.82,19.05 85.09,22.86 86.36,27.94 v87.63,29.21
  Bottom 0.406: U$3.AB2 10.16,7.62 13.97,7.62 17.78,8.89 22.86,8.89 v26.67,6.35 | E3.1 74.93,30.48 80.01,30.48 82.55,29.21 v87.63,29.21
N$67  (via drill 0.81)
  Top 0.406: E2.2 29.21,34.29 24.13,38.1 21.59,39.37 8.89,39.37 U$3.AN1 | E11.5 38.1,123.19 46.99,123.19 55.88,116.84 55.88,110.49 v53.34,92.71 | v77.47,92.71 82.55,87.63 v82.55,71.12 81.28,54.61 81.28,39.37 77.47,36.83 74.93,35.56 72.39,33.02 E3.2 68.58,26.67 57.15,26.67 v54.61,29.21
  Bottom 0.406: E2.2 44.45,29.21 v54.61,29.21 | E10.8 v82.55,71.12 | v53.34,92.71 v77.47,92.71
N$68
  Top 0.406: U$3.BU1 8.89,124.46 15.24,124.46 27.94,120.65 E11.6
N$69
  Top 0.406: U$3.AJ1 8.89,26.67 13.97,26.67 21.59,20.32 26.67,20.32 E2.8 29.21,17.78 50.8,17.78 53.34,19.05 55.88,17.78 E1.6
N$70
  Top 0.406: U$3.AD1 8.89,13.97 13.97,13.97 21.59,12.7 62.23,12.7 E1.5
N$71
  Top 0.406: U$3.BM1 8.89,105.41 40.64,105.41 | 40.64,105.41 E11.13 | 40.64,105.41 49.53,85.09 | 49.53,85.09 52.07,80.01 52.07,69.85 53.34,63.5 53.34,59.69 50.8,55.88 45.72,50.8 45.72,49.53 46.99,48.26 52.07,46.99 54.61,44.45 54.61,40.64 52.07,34.29 52.07,27.94 53.34,22.86 54.61,20.32 55.88,19.05 58.42,17.78 63.5,16.51 E1.4 | E8.1 49.53,85.09 | E11.1 40.64,120.65 38.1,120.65 E11.4
  Bottom 0.406: E11.13 40.64,111.76 38.1,113.03 36.83,113.03 34.29,111.76 E11.10 30.48,113.03 27.94,114.3 26.67,115.57 26.67,119.38 27.94,120.65 33.02,120.65 35.56,119.38 E11.4 | E1.10 63.5,7.62 | 63.5,7.62 64.77,8.89 69.85,8.89 71.12,7.62 E1.13 | 63.5,7.62 58.42,10.16 55.88,12.7 55.88,15.24 58.42,16.51 63.5,16.51 E1.4 68.58,16.51 71.12,16.51 E1.1 | E8.13 38.1,77.47 33.02,77.47 | 33.02,77.47 29.21,77.47 26.67,78.74 25.4,81.28 26.67,83.82 29.21,85.09 35.56,85.09 | 35.56,85.09 40.64,85.09 E8.1 | E8.4 35.56,85.09 | E8.10 33.02,77.47
N$72
  Top 0.406: U$3.AC1 8.89,10.16 67.31,10.16 E1.2
N$73
  Top 0.406: U$3.BD1 8.89,83.82 13.97,83.82 E8.8
N$74
  Top 0.406: E8.3 39.37,83.82 39.37,99.06 36.83,100.33 35.56,100.33 33.02,99.06 31.75,95.25 30.48,93.98 27.94,92.71 13.97,96.52 8.89,96.52 U$3.BJ1
N$75
  Top 0.406: U$3.BP1 10.16,111.76 16.51,111.76 E11.8
N$76
  Bottom 0.406: E11.3 35.56,120.65 33.02,121.92 27.94,121.92 21.59,118.11 15.24,115.57 8.89,115.57 U$3.BR2
N$77
  Top 0.406: U$3.BH1 8.89,92.71 13.97,92.71 21.59,91.44 29.21,88.9 30.48,85.09 E8.6
N$79
  Top 0.406: U$3.AB1 8.89,7.62 13.97,7.62 17.78,8.89 55.88,8.89 E1.8
VCC  (via drill 0.81)
  Top 0.813: v33.02,6.35 36.83,2.54 73.66,2.54 80.01,5.08 C1.1 87.63,5.08 R1.2 | v39.37,66.04 E8.14
  Bottom 0.813: E11.14 C11.1 49.53,114.3 52.07,116.84 53.34,116.84 60.96,113.03 71.12,113.03 73.66,111.76 E12.14 C12.1 78.74,111.76 80.01,113.03 101.6,113.03 E13.14 C13.1 111.76,110.49 114.3,107.95 114.3,74.93 | U$3.AA2 11.43,3.81 15.24,3.81 C16.+ 22.86,3.81 30.48,3.81 v33.02,6.35 | E1.14 C1.1 | E2.14 C2.1 50.8,21.59 55.88,24.13 72.39,24.13 E3.14 C3.1 88.9,22.86 92.71,21.59 101.6,21.59 102.87,20.32 E4.14 C4.1 114.3,19.05 | E5.14 C5.1 52.07,46.99 59.69,46.99 63.5,45.72 71.12,45.72 E6.14 C6.1 82.55,48.26 86.36,48.26 90.17,45.72 101.6,45.72 102.87,44.45 E7.14 C7.1 114.3,44.45 | 114.3,19.05 114.3,44.45 | 114.3,74.93 C10.1 E10.14 102.87,74.93 100.33,77.47 87.63,77.47 C9.1 E9.14 71.12,77.47 53.34,77.47 C8.1 E8.14 | 114.3,74.93 114.3,44.45 | 24.13,66.04 C15.+ 20.32,69.85 | 24.13,66.04 v39.37,66.04 | U$3.BA2 10.16,73.66 16.51,73.66 20.32,69.85 | 20.32,69.85 24.13,66.04 | R1.2 106.68,2.54 113.03,2.54 114.3,3.81 115.57,7.62 115.57,17.78 114.3,19.05

## Text on the board
Top: FLIP CHIP
Bottom: REGISTER MODULE | M226A